# Altium PCB PCB1.PcbDoc (part 1 of 3)
Units mil, origin at the board's own origin, x right, y up, seen from the top; angles counter-clockwise.
Board outline 3051.58 x 3543.22 mil, 2 copper layers (Top Layer, Bottom Layer), stack 22.441 mil thick; 24 components, 24 nets, 64 pads, 1 vias.
Unrouted connection lines stored in the file: 1.
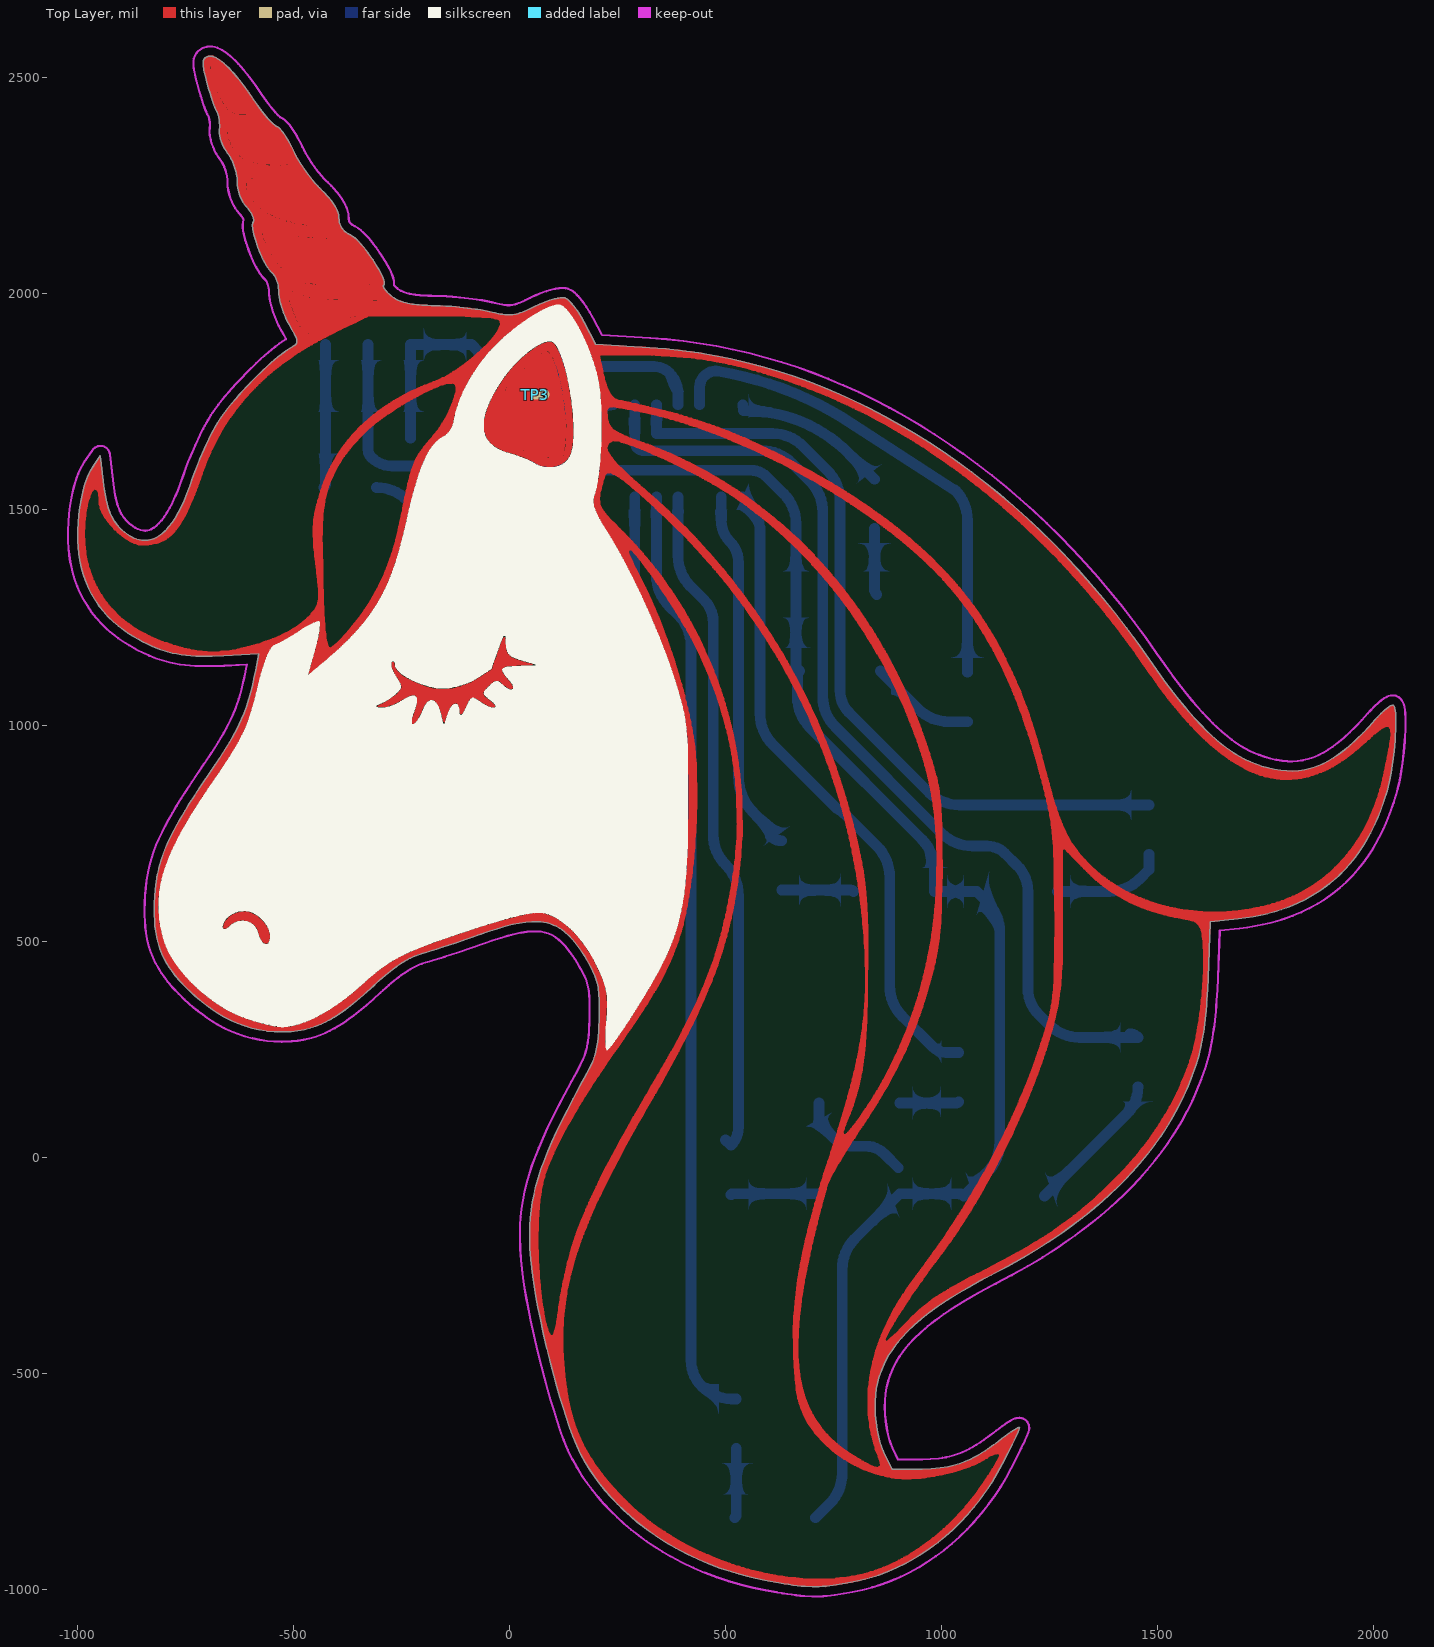
[diagram p0: Top Layer view]
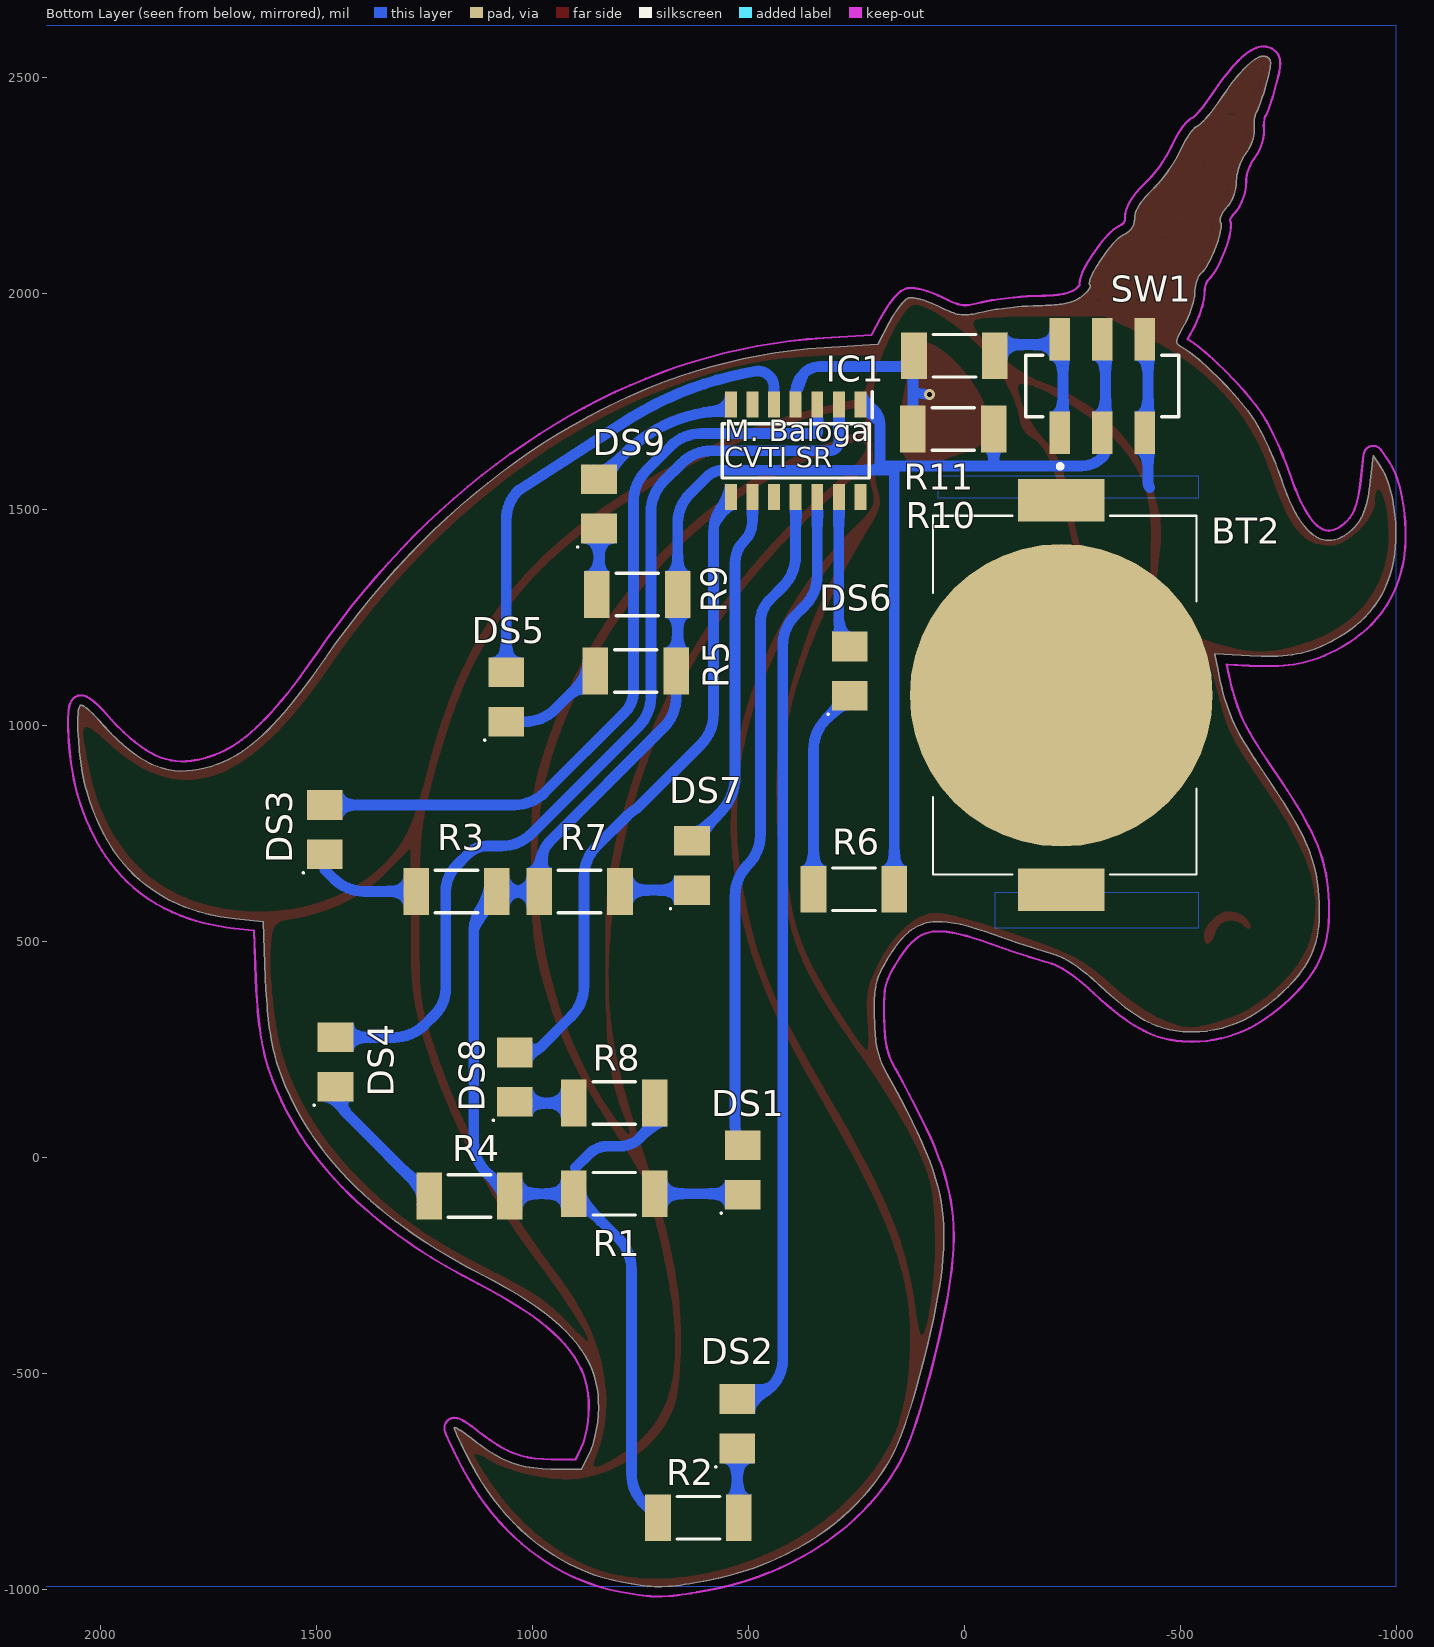
[diagram p1: Bottom Layer view, seen from below]
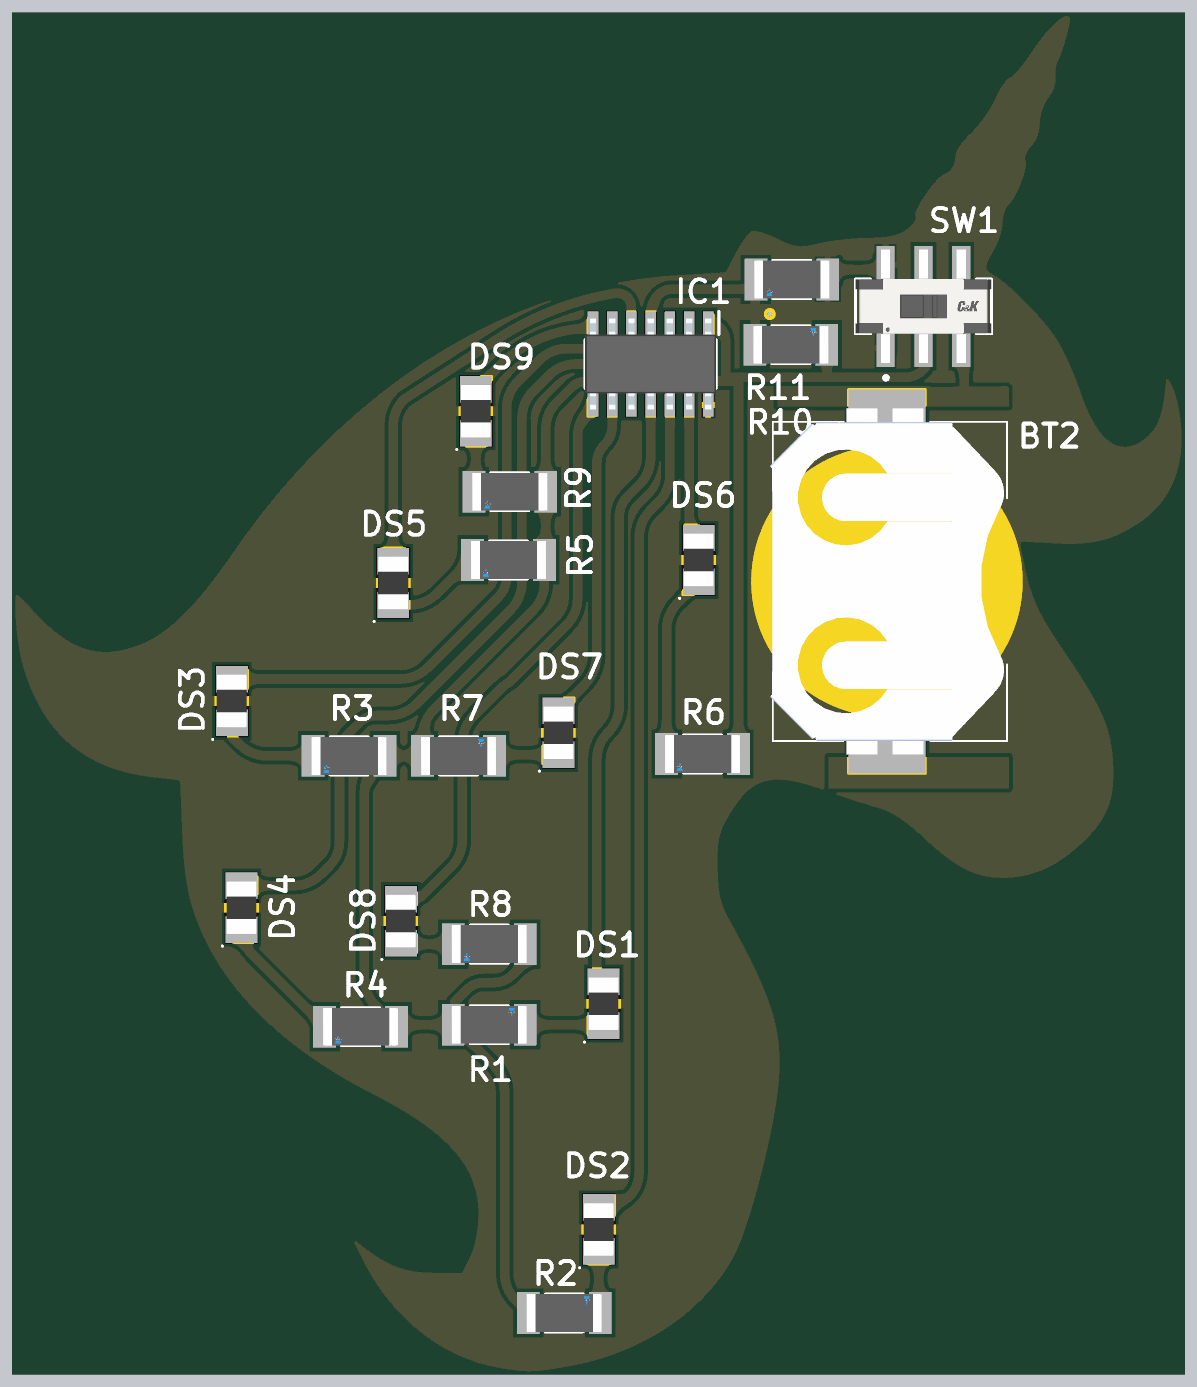
[diagram p4: 3D render of the assembled board from below, using the file's embedded part models]

## Layer stack, top to bottom
Top Solder: solder mask 0.5, Solder Resist, Dk 3.8
Top Layer: signal copper 1.378
Dielectric: core 19.685, FR-4, Dk 4.5
Bottom Layer: signal copper 1.378
Bottom Solder: solder mask 0.5, Solder Resist, Dk 3.8

## Board outline
427 vertices, not listed, extent -999.74,-994.69 2051.84,2548.53

## Design rules (kind name [scope] priority, off if disabled: settings)
BoardOutlineClearance [All] p1: gap=7.87 ignorepadtopadclearanceinfootprint=FALSE
Clearance Clearance_1 [All] p1: gap=5 ignorepadtopadclearanceinfootprint=FALSE except(9.84: Arc-Hole Track-Hole SMDPad-Hole THPad-Hole Via-Hole Fill-Hole Region-Hole Text-Hole; 10: Arc-Poly Track-Poly SMDPad-Poly THPad-Poly Via-Poly Fill-Poly Poly-Poly Poly-Region Poly-Text Poly-Hole)
ComponentClearance [All] p1: gap=5 collisioncheckmode=3 verticalgap=5 showdistances=TRUE
DiffPairsRouting [All] p1: maxlimit=10 minlimit=5 mostfreqgap=5 toplayer_minwidth=5 toplayer_maxwidth=1000 toplayer_prefwidth=5 bottomlayer_minwidth=5 bottomlayer_maxwidth=1000 bottomlayer_prefwidth=5 maxuncoupledlength=500
Height [All] p1: minheight=0 maxheight=71497.94 prefheight=500
HoleSize [All] p1: absolutevalues=TRUE maxlimit=248.03 minlimit=11.81 maxpercent=80.000 minpercent=20.000
HoleToHoleClearance [All] p1: gap=9.84 allowstackedmicrovias=FALSE
MinimumAnnularRing [All] p1: minimumring=3
MinimumSolderMaskSliver [All] p1: minsoldermaskwidth=0
PlaneClearance [All] p1: clearance=5
PlaneConnect PlaneConnectPowerPads [InPadClass('PowerPads')] p1: planeconnectstyle=Direct reliefexpansion=20 reliefentries=4 reliefconductorwidth=10 reliefairgap=10
PlaneConnect [All] p2: pad.planeconnectstyle=Relief pad.reliefexpansion=11.81 pad.reliefentries=4 pad.reliefconductorwidth=5 pad.reliefairgap=5 via.planeconnectstyle=Direct via.reliefexpansion=11.81 via.reliefentries=4 via.reliefconductorwidth=5 via.reliefairgap=5
PolygonConnect PolygonConnect_1 [HasFootprint('BAT_BAT-HLD-001')] p1: connectstyle=Direct reliefconductorwidth=10 reliefentries=4 polygonreliefangle="90 Angle" airgapwidth=10
PolygonConnect PolygonConnectPowerPads [All vs (InPadClass('PowerPads'))] p2: connectstyle=Direct reliefconductorwidth=10 reliefentries=4 polygonreliefangle="90 Angle" airgapwidth=10
PolygonConnect [InNet('GND')] p3: thpad.connectstyle=Relief thpad.reliefconductorwidth=15 thpad.reliefentries=4 thpad.polygonreliefangle="90 Angle" thpad.airgapwidth=5 smdpad.connectstyle=Relief smdpad.reliefconductorwidth=15 smdpad.reliefentries=4 smdpad.polygonreliefangle="90 Angle" smdpad.airgapwidth=5 via.connectstyle=Direct via.reliefconductorwidth=5 via.reliefentries=4 via.polygonreliefangle="90 Angle" via.airgapwidth=5
RoutingVias [All] p1: holewidth=11.81 width=23.62 viastyle="Through Hole" minholewidth=11.81 minwidth=23.62 maxholewidth=23.62 maxwidth=259.84
SilkToSilkClearance [All] p1: silktosilkclearance=0
SilkToSolderMaskClearance [IsPad] p1: minsilkscreentomaskgap=5 clearancetoexposedcopper=TRUE
SolderMaskExpansion [All] p1: expansion=2.95 istentingtop=FALSE
Width [All] p1: maxlimit=1000 minlimit=5 preferedwidth=5 minimp=50.000000 maximp=50.000000 favimp=50.000000
20 further rules are at their usual default settings.

## Components (designator, comment, footprint, x,y, rotation, side; value= is the part's Value field where it differs from the comment)
BT2 "BAT-HLD-001" BAT_BAT-HLD-001 -225,1069.21 r90 bottom
DS1 "LED_BLUE-1206" LEDC3418X06M 512.5,-30 r90 bottom
DS2 "LED_BLUE-1206" LEDC3418X06M 525,-617.5 r90 bottom
DS3 "LED_BLUE-1206" LEDC3418X06M 1480,757.91 r90 bottom
DS4 "LED_BLUE-1206" LEDC3418X06M 1455,220 r90 bottom
DS5 "LED_BLUE-1206" LEDC3418X06M 1060,1065 r90 bottom
DS6 "LED_BLUE-1206" LEDC3418X06M 265,1125 r90 bottom
DS7 "LED_BLUE-1206" LEDC3418X06M 630,675 r90 bottom
DS8 "LED_BLUE-1206" LEDC3418X06M 1040,185 r90 bottom
DS9 "LED_BLUE-1206" LEDC3418X06M 845,1512.09 r90 bottom
IC1 "ATTINY404-SSN" SOIC127P600X175-14N 390,1635 r270 bottom
R1 "CRCW201082R0JNEF" FP-CRCW2010-e3-IPC_A 810,-85 r180 bottom
R2 "CRCW201082R0JNEF" FP-CRCW2010-e3-IPC_A 615,-835 r180 bottom
R3 "CRCW201082R0JNEF" FP-CRCW2010-e3-IPC_A 1175,615 r0 bottom
R4 "CRCW201082R0JNEF" FP-CRCW2010-e3-IPC_A 1145,-90 r0 bottom
R5 "CRCW201082R0JNEF" FP-CRCW2010-e3-IPC_A 760,1125 r0 bottom
R6 "CRCW201082R0JNEF" FP-CRCW2010-e3-IPC_A 255,620 r0 bottom
R7 "CRCW201082R0JNEF" FP-CRCW2010-e3-IPC_A 890,615 r180 bottom
R8 "CRCW201082R0JNEF" FP-CRCW2010-e3-IPC_A 810,125 r0 bottom
R9 "CRCW201082R0JNEF" FP-CRCW2010-e3-IPC_A 756.52,1302.44 r0 bottom
R10 "CRCW201082R0JNEF" FP-CRCW2010-e3-IPC_A 25,1685 r180 bottom
R11 "CRCW201082R0JNEF" FP-CRCW2010-e3-IPC_A 22.5,1855 r0 bottom
SW1 "JS202011SCQN" FP-JS202011SCQN-MFG -320,1785 r180 bottom
TP3 "TPAD6R" TP06R 60,1765 r90 bottom

## Footprints (in the part's own frame and the unit in brackets; to place one, negate y for a bottom-side part, rotate by r counter-clockwise, add the part's x,y. Pads: shape width x height; smd on the part's side, far side on the other; paste and mask are expansions set on the pad)
BAT_BAT-HLD-001 [mm]
  round 17.8 smd paste-10: N1(0,0)
  rect 2.5x5.1 smd: P1(-11.45,0) P2(11.45,0)
  silkscreen extent -10.55,-7.95 10.55,7.55, body extent -11.43,-7.75 11.43,7.75, height 4.32
FP-CRCW2010-e3-IPC_A [mil]
  rect 59.29x108.59 smd paste+0 mask+0: 1(-93.55,0) 2(93.55,0)
  silkscreen extent -49,-49 49,49, body extent -98,-49 98,49, height 28
FP-JS202011SCQN-MFG [mm]
  rect 1.2x2.5 smd paste+0 mask+0: 1(-2.5,-2.75) 2(0,-2.75) 3(2.5,-2.75) 4(-2.5,2.75) 5(0,2.75) 6(2.5,2.75)
  silkscreen extent -4.5,-4.85 4.5,1.8, body extent -4.5,-3.75 4.5,3.75, height 5.5
LEDC3418X06M [mm] "Chip Diode, 2-Leads, Body 3,35x1,80mm, IPC Low Density"
  rect 1.75x2.1 smd: 1(-1.45,0) 2(1.45,0)
  silkscreen extent -2.59,1.21 -2.49,1.31, body extent -1.75,-1 1.75,1, height 0.6
SOIC127P600X175-14N [mm]
  rect 1.525x0.7 smd: 1(-2.712,3.81) 2(-2.712,2.54) 3(-2.712,1.27) 4(-2.712,0) 5(-2.712,-1.27) 6(-2.712,-2.54) 7(-2.712,-3.81) 8(2.712,-3.81) 9(2.712,-2.54) 10(2.712,-1.27) 11(2.712,0) 12(2.712,1.27) 13(2.712,2.54) 14(2.712,3.81)
  silkscreen extent -3.47,-4.33 1.6,4.51, body extent -3,-4.33 3,4.33, height 1.75
TP06R [mm] "Testpoint, round, d=0.6mm"
  round 0.6 smd far side paste-1: 1(0,0)

## Part data
BT2: "Battery Retainer Coin, 20.0mm 1 Cell SMD (SMT) Tab", Package=None, Availability=Unavailable, MF="{'manufacturer': u'Linx'}", MP=BAT-HLD-001, Price=None
DS1 DS2 DS3 DS4 DS5 DS6 DS7 DS8 DS9: library part CMP-007-00036-1, "Generic LED in 1206 package"
IC1: "Integrated Circuit", Manufacturer_Name=Microchip, Mouser Part Number=579-ATTINY404-SSN, Arrow Part Number=ATTINY404-SSN, Arrow Price/Stock=https://www.arrow.com/en/products/attiny404-ssn/microchip-technology?region=nac, Datasheet Link=https://componentsearchengine.com/Datasheets/2/ATTINY404-SSN.pdf, Height=1.75mm, Manufacturer_Part_Number=ATTINY404-SSN, Mouser Price/Stock=https://www.mouser.co.uk/ProductDetail/Microchip-Technology/ATTINY404-SSN?qs=3HJ2avRr9PJ8OrTjUlXZkg%3D%3D
R1 R2 R3 R4 R5 R6 R7 R8 R9 R10 R11: library part CMP-02407-006949-1, "RES Thick Film, 82Ω, 5%, 0.75W, 200ppm/°C, 2010", Case Code (Imperial)=2010, Case Code (Metric)=5025, Max Operating Temperature=155°C, Max Power Dissipation=750mW, Min Operating Temperature=-55°C, Package Quantity=1, Resistance=82R, Temperature Coefficient=200ppm/°C, Tolerance=5%, Voltage Rating=400V, Case/Package=2010, Composition="Thick Film", Contact Plating=Tin, Depth=2.5mm, Features="Automotive AEC-Q200", Height=0.028inch, Lead Free="Lead Free", Length=5mm, Military Standard=Not, Number of Pins=2, Number of Terminations=2, Packaging="Tape and Reel", Power Rating=750mW, Radiation Hardening=No, Voltage Rating (DC)=400V, Weight=0.000899oz, Width=2.5mm
SW1: library part CMP-2000-05087-3, "SWITCH SLIDE DPDT 300MA 6V", Actuator Color=Black, Contact Current Rating=300mA, Contact Resistance=70mR, Flammability Rating="UL94 V-2", Max Operating Temperature=85°C, Max Voltage Rating (DC)=6V, Min Operating Temperature=-20°C, Package Quantity=1, Actuator Length=2mm, Actuator Material=Nylon, Actuator Type=Standard, Contact Material="Copper Alloy", Contact Plating=Silver, Current Rating=300mA, Depth=7.5mm, Electrical Life=5000Cycles, Housing Material=Nylon, Lead Free="Lead Free", Length=9mm, Max Current Rating=300mA, Mount="Surface Mount", Orientation=Vertical, Packaging="Tape and Reel", Radiation Hardening=No, REACH SVHC="No SVHC", Series=JS, Switch Function=On-On, Switch Travel=2mm, Termination="Gull Wing", Throw Configuration=DPDT, Voltage Rating (DC)=6V
TP3: library part CMP-00028-00002-1, "0.6mm round", Pins=1

## Via types
v1: diameter 25, hole 12, Top Layer to Bottom Layer, 1 vias

## Nets (pads, with @x,y where several pads share a name; then routed paths per layer and width w, separated by ;. In a path a pad name is that pad's centre, name@x,y a point inside that pad or via, vN(x,y) a via of type N, cw(c..) or ccw(c..) an arc to the next point about the centre after c; other vN are vias at no path point)
AIN4/PWM4: DS4.2 IC1.2 | length 2286.1
  Bottom Layer w25: IC1.2@290,1741.77 290,1656.97 ccw(c311.97,1656.97) 311.97,1635 583.58,1635 cw(c583.58,1535) 654.29,1605.71 695.71,1564.29 cw(c625,1493.58) 725,1493.58 725,1066.42 ccw(c825,1066.42) 754.29,995.71 1000.71,749.29 ccw(c1071.42,820) 1071.42,720 1105,720 cw(c1105,659.64) 1147.68,702.32 1175,675 cw(c1114.64,614.64) 1200,614.64 1200,390.36 ccw(c1285.36,390.36) 1225,330 1248.62,306.38 ccw(c1319.33,377.09) 1319.33,277.09 DS4.2@1455,277.09 ccw(c1435.9,257.98) DS4.2@1435.9,285
AIN5/PWM5: DS3.2 IC1.3 | length 1845.7
  Bottom Layer w25: IC1.3@340,1741.77 340,1675 608.58,1675 cw(c608.58,1575) 679.29,1645.71 735.71,1589.29 cw(c665,1518.58) 765,1518.58 765,1080 ccw(c837.43,1080) 786.21,1028.79 970.71,844.29 ccw(c1041.42,915) 1041.42,815 DS3.2@1480,815
AIN6: IC1.4 R10.1 R11.2 TP3.1 | length 553.8
  Bottom Layer w25: v1(80,1765) 117.93,1770 ; R10.1@118.55,1685 117.93,1726.8 117.93,1770 ; IC1.4@390,1741.77 390,1766.72 ccw(c321.72,1766.72) 370,1815 ccw(c333.79,1778.79) 333.79,1830 155,1830 cw(c155,1863.69) 131.18,1839.87 R11.2@116.05,1855 117.93,1813.2 117.93,1770
AIN7: DS5.2 IC1.5 | length 1154.6
  Bottom Layer w25: IC1.5@440,1741.77 440,1782.18 cw(c477.5,1782.09) 483.77,1819.07 cw(c346.79,1015.96) 767.27,1713.77 1031.72,1543.28 ; 1030.67,1544.33 1031.72,1543.28 ; DS5.2@1060,1122.09 1060,1475 ccw(c963.43,1475) 1031.72,1543.28
EXTCLK/SCK: DS6.2 IC1.13 | length 372.8
  Bottom Layer w25: DS6.2@285,1182.09 DS6.2@265,1182.09 ccw(c204.64,1242.44) 290,1242.44 IC1.13@290,1528.23
GND: BT2.N1 IC1.14 R11.1 SW1.1 SW1.4 | length 390.3
  Bottom Layer w25: SW1.1@-229.07,1664.23 -229.07,1880.77 -88.19,1880.77 -71.05,1863.62 R11.1@-71.05,1855
MISO: DS2.2 IC1.12 | length 2178
  Bottom Layer w25: IC1.12@340,1528.23 340,1346.42 ccw(c440,1346.42) 369.29,1275.71 390.71,1254.29 cw(c320,1183.58) 420,1183.58 420,-470 ccw(c505.95,-470) 445.17,-530.77 445.23,-530.83 ccw(c516.74,-459.21) DS2.2@524.97,-560.08
MOSI: DS1.2 IC1.11 | length 1565.5
  Bottom Layer w25: IC1.11@390,1528.23 390,1391.42 ccw(c490,1391.42) 419.29,1320.71 450,1290 cw(c397.73,1237.73) 471.65,1237.73 471.65,1191.48 471.65,745.54 ccw(c568.88,745.54) 500.71,676.21 cw(c430,605.5) 530,605.5 530,69.34 cw(c470.25,69.34) DS1.2@512.5,27.09 DS1.2@500,39.59
NetBT2_P1: BT2.P1 BT2.P2 SW1.3 SW1.6 | length 495.7
  Bottom Layer w25: -430,1550 ccw(c-439.84,1559.84) -425.93,1559.84 -425.93,1664.23 SW1.6@-425.93,1880.77 ; BT2.P2@-308.03,1550 cw(c-308.03,1450.26) -237.5,1520.79 -232.58,1525.71 cw(c-161.87,1455) BT2.P2@-161.87,1555
NetDS1_1: DS1.1 R1.2 | length 204.5
  Bottom Layer w25: DS1.1@512.5,-87.09 cw(c517.54,-92.12) 517.54,-85 R1.2@716.45,-85
NetDS2_1: DS2.1 R2.2 | length 161.4
  Bottom Layer w25: R2.2@521.45,-835 ccw(c512.89,-826.44) 525,-826.44 DS2.1@525,-674.59
NetDS3_1: DS3.1 R3.2 | length 263.7
  Bottom Layer w25: R3.2@1268.55,615 1388.58,615 ccw(c1388.58,715) 1459.29,644.29 1480,665 DS3.1@1480,700.83
NetDS4_1: DS4.1 R4.2 | length 338.8
  Bottom Layer w25: R4.2@1238.55,-90 1429.22,100.67 ccw(c1366.98,162.91) DS4.1@1455,162.91
NetDS5_1: DS5.1 R5.2 | length 245.6
  Bottom Layer w25: R5.2@858.55,1125 946.34,1037.2 ccw(c1017.05,1107.91) 1017.05,1007.91 DS5.1@1060,1007.91
NetDS6_1: DS6.1 R6.2 | length 478.2
  Bottom Layer w25: DS6.1@265,1067.91 319.26,1013.66 cw(c248.55,942.95) 348.55,942.95 R6.2@348.55,620
NetDS7_1: DS7.1 R7.2 | length 167.2
  Bottom Layer w25: DS7.1@630,617.91 789.42,617.91 cw(c789.42,607.97) R7.2@796.45,615
NetDS8_1: DS8.1 R8.2 | length 137.2
  Bottom Layer w25: R8.2@903.55,125 1032.97,125 ccw(c1032.97,134.95) DS8.1@1040,127.91
NetDS9_1: DS9.1 R9.2 | length 153.9
  Bottom Layer w25: DS9.1@845,1455 845,1314.67 ccw(c862.29,1314.67) R9.2@850.07,1302.44
RESET: IC1.10
RxD: IC1.6
SCL: DS8.2 IC1.8 | length 1503.8
  Bottom Layer w25: IC1.8@540,1528.23 550.71,1517.52 cw(c480,1446.81) 580,1446.81 580,1025.7 ccw(c680,1025.7) 609.29,954.99 756.51,807.76 cw(c708.58,720) 779.29,790.71 850.71,719.29 cw(c780,648.58) 880,648.58 880,396.42 ccw(c980,396.42) 909.29,325.71 980.01,254.99 ccw(c1011.18,286.18) 1011.18,242.09 DS8.2@1040,242.09
SDA: DS7.2 IC1.9 | length 846.1
  Bottom Layer w25: IC1.9@490,1528.23 490,1473.28 ccw(c558.28,1473.28) 510,1425 cw(c461.72,1376.72) 530,1376.72 530,880.58 ccw(c647.07,880.58) 564.29,797.8 DS7.2@611.79,750.3 ; DS7.2@604.25,742.75 ccw(c630,768.51) DS7.2@630,732.09
TxD/PWM2: DS9.2 IC1.7 | length 368.6
  Bottom Layer w25: IC1.7@540,1741.77 541.28,1728.24 545.6,1728.24 cw(c545.6,1389.46) 785.17,1629.01 785.23,1628.94 DS9.2@845,1569.17
VCC: IC1.1 R1.1 R2.1 R3.1 R4.1 R5.1 R6.1 R7.1 R8.1 R9.1 R10.2 SW1.2 SW1.5 | length 5656.8
  Bottom Layer w25: SW1.5@-327.5,1880.77 -327.5,1638.11 ccw(c-301.89,1638.11) -320,1620 ccw(c-271.72,1668.28) -271.72,1600 -64.53,1600 ; R10.2@-68.55,1685 -68.55,1609.7 ccw(c-54.83,1609.7) -64.53,1600 ; R6.1@161.45,620 161.45,1590 195,1590 ; IC1.1@240,1741.77 ccw(c240,1696.77) 195,1696.77 195,1605 ; R5.1@666.45,1125 666.45,1064.97 ccw(c766.45,1064.97) 695.74,994.26 954.26,735.74 cw(c883.55,665.03) 983.55,665.03 R7.1@983.55,615 R3.1@1081.45,615 1105.71,590.74 cw(c1035,520.03) 1135,520.03 1135,34.97 cw(c1035,34.97) 1105.71,-35.74 R4.1@1051.45,-90 ccw(c1039.38,-102.07) 1039.38,-85 R1.1@903.55,-85 799.29,-189.26 ccw(c870,-259.97) 770,-259.97 770,-732.13 cw(c670,-732.13) 740.71,-802.84 R2.1@708.55,-835 ; R5.1@671.45,1125 662.97,1133.48 R9.1@662.97,1302.44 662.97,1467.5 ccw(c567.54,1467.5) 635.02,1534.98 595,1575 ccw(c558.79,1538.79) 558.79,1590 195,1590 ; R8.1@716.45,125 716.45,83.51 cw(c711.49,83.51) 715,80 750.71,44.29 ccw(c797.28,90.86) 797.28,25 825,25 cw(c825,-35.36) 867.68,7.32 867.75,7.25 900,-25 ; -64.53,1600 182.93,1600 ccw(c182.93,1617.07) 195,1605 ; 195,1590 195,1605

## Polygon pours and split planes (outlines as drawn)
GND on Bottom Layer "NONET_L02_P-001" (solid, shelved, pour order 4): -999.63,-995 2520,-995 2520,2620 -999.63,2620
NetBT2_P1 on Bottom Layer "NONET_L02_P-001" (solid, shelved, pour order 3): -337.09,1575.17 -337.09,1577.23 -542.11,1577.23 -542.11,1524.73 60.39,1524.73 60.39,1577.23 -539.61,1577.23
NetBT2_P1 on Bottom Layer "NONET_L02_P-001" (solid, shelved, pour order 0): -542.5,612.5 -542.5,530 -72.5,530 -72.5,612.5

## Keep-outs
Keep-Out Layer: